# Altium PCB PCB.PcbDoc
Units mm, origin at the board's own origin, x right, y up, seen from the top; angles counter-clockwise.
Board outline 100 x 71 mm, 2 copper layers (TOP, BOT), stack 1.636 mm thick; 74 components, 41 nets, 204 pads, 178 vias.
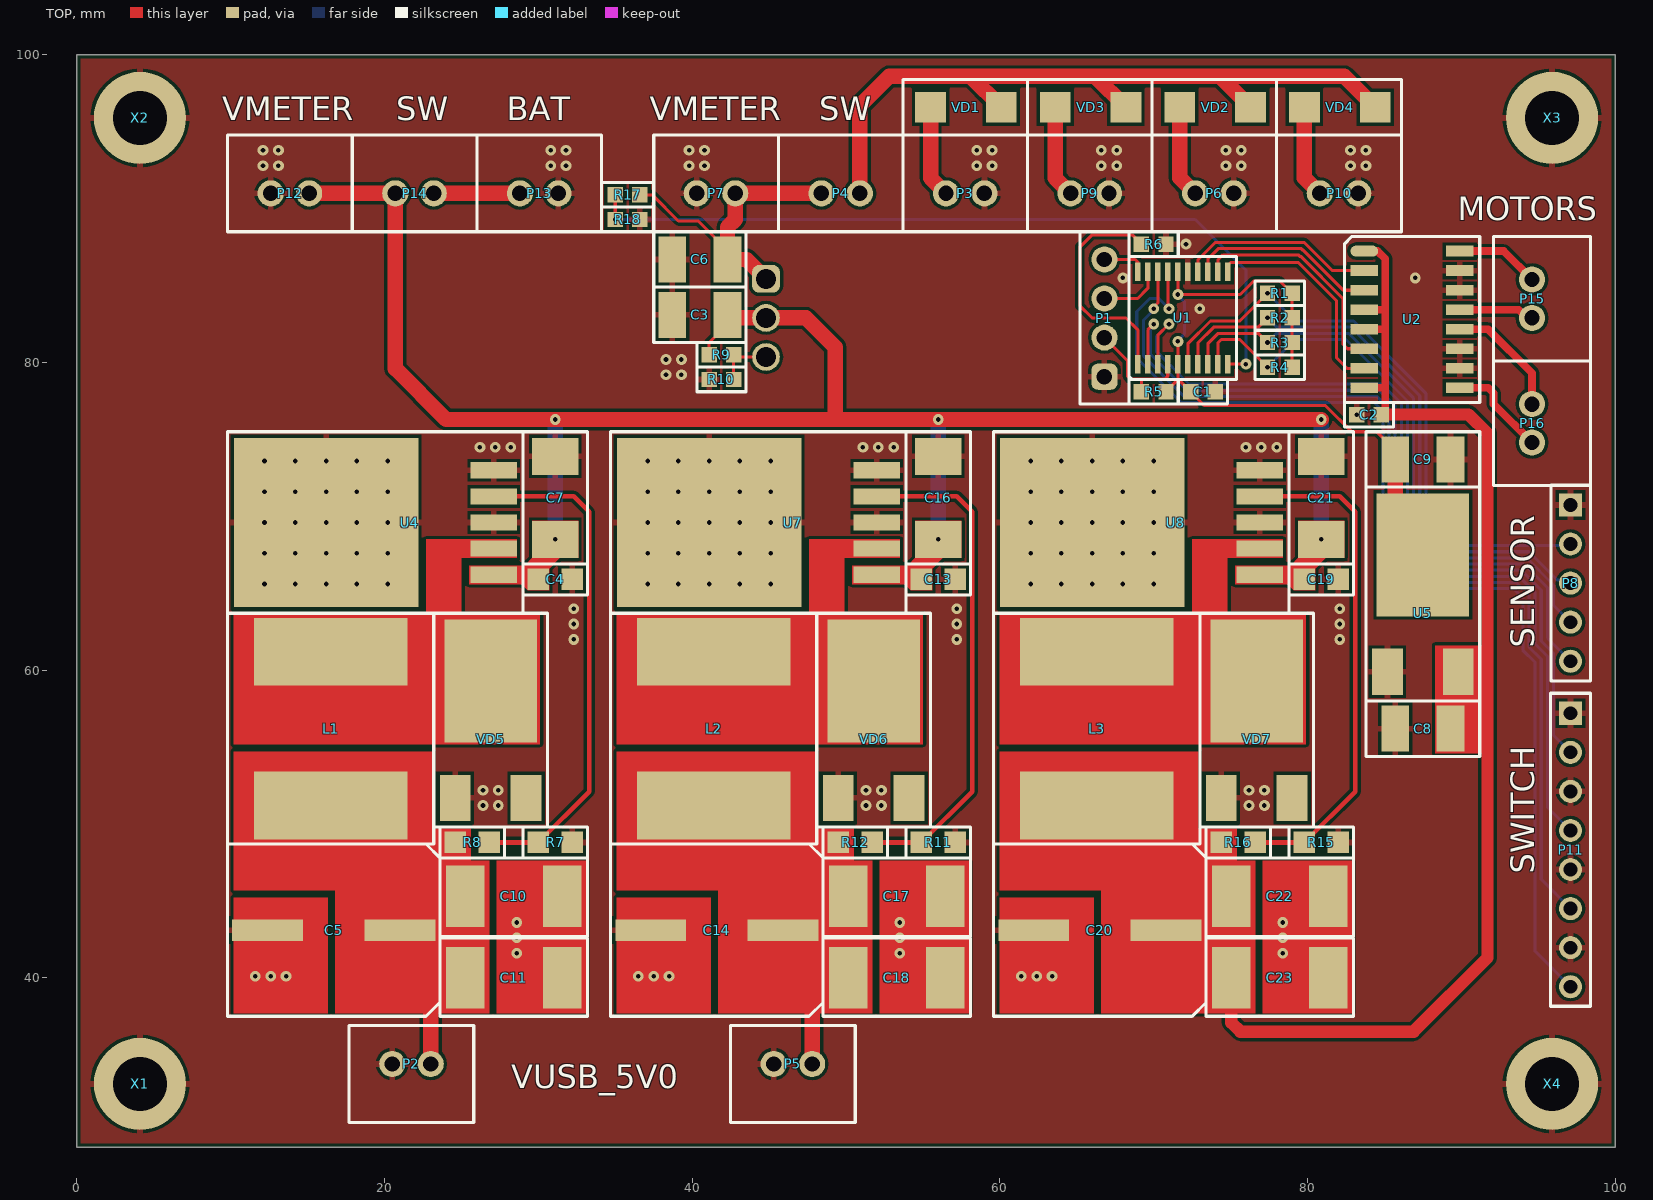
[diagram p0: TOP view]
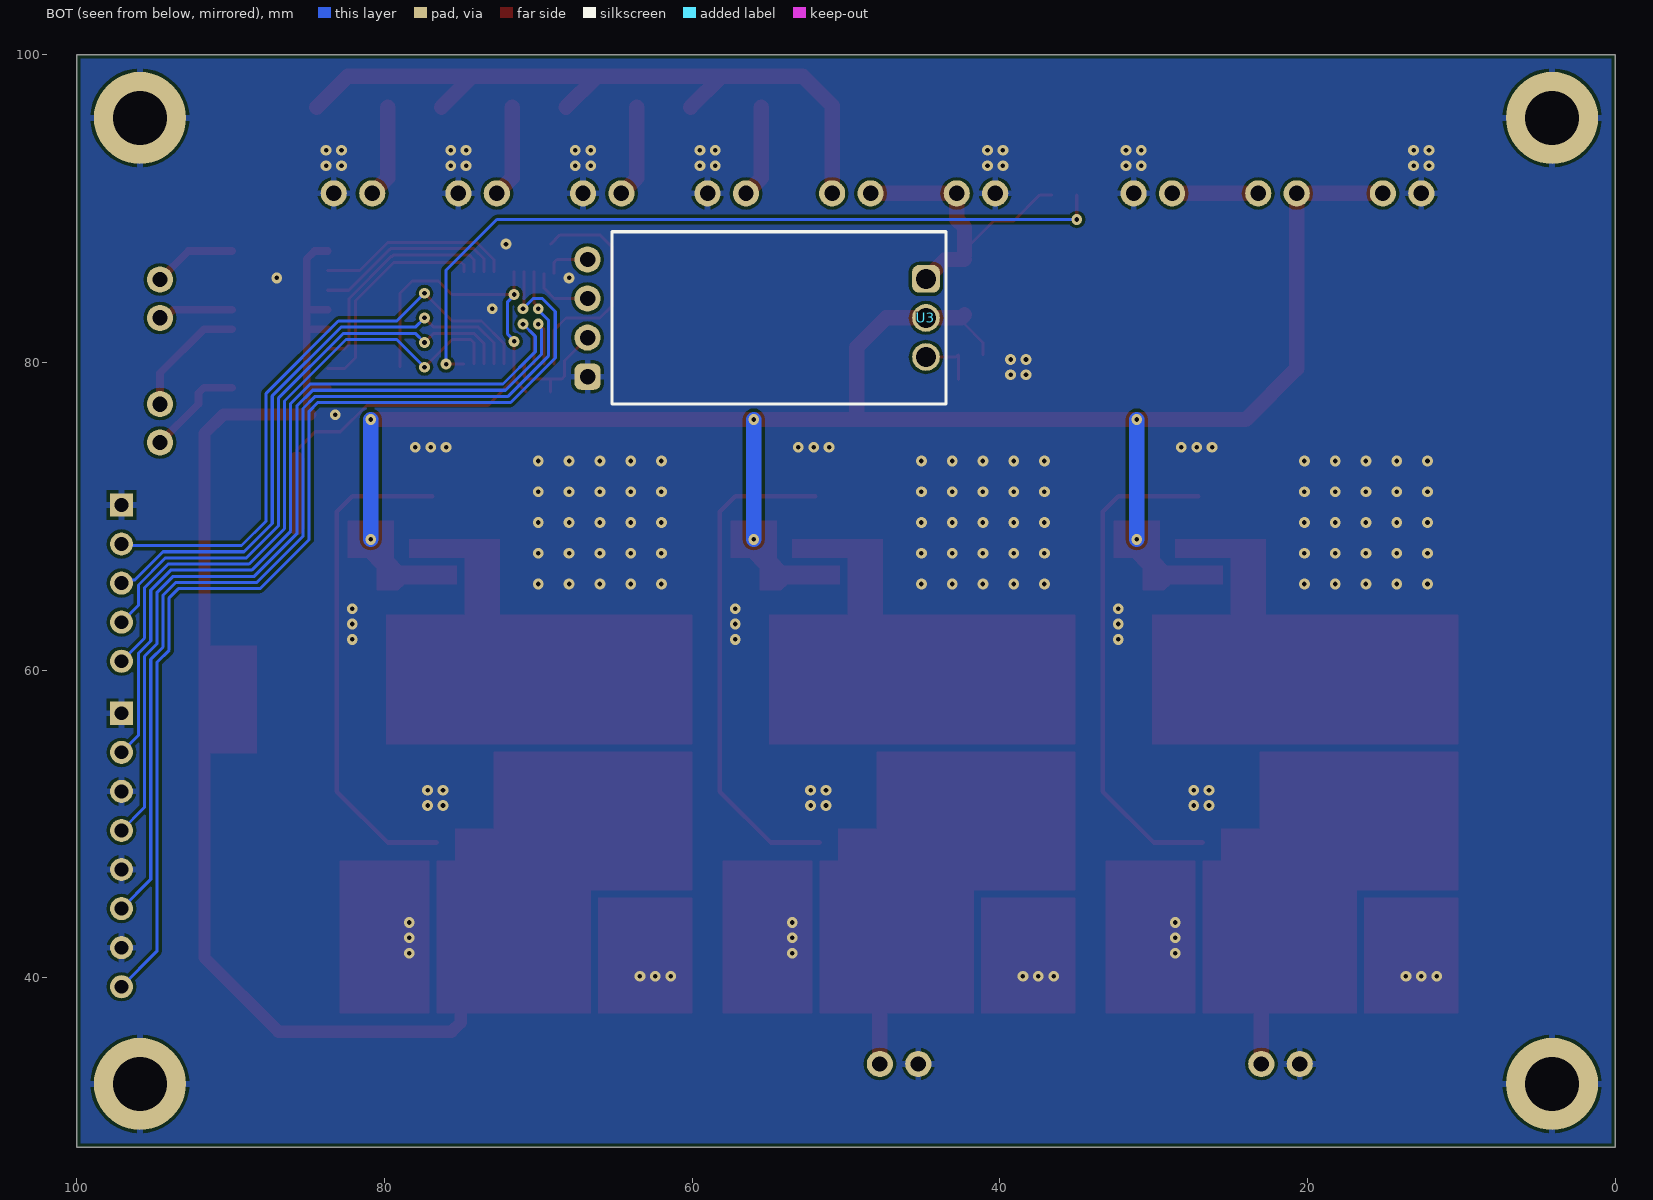
[diagram p1: BOT view, seen from below]
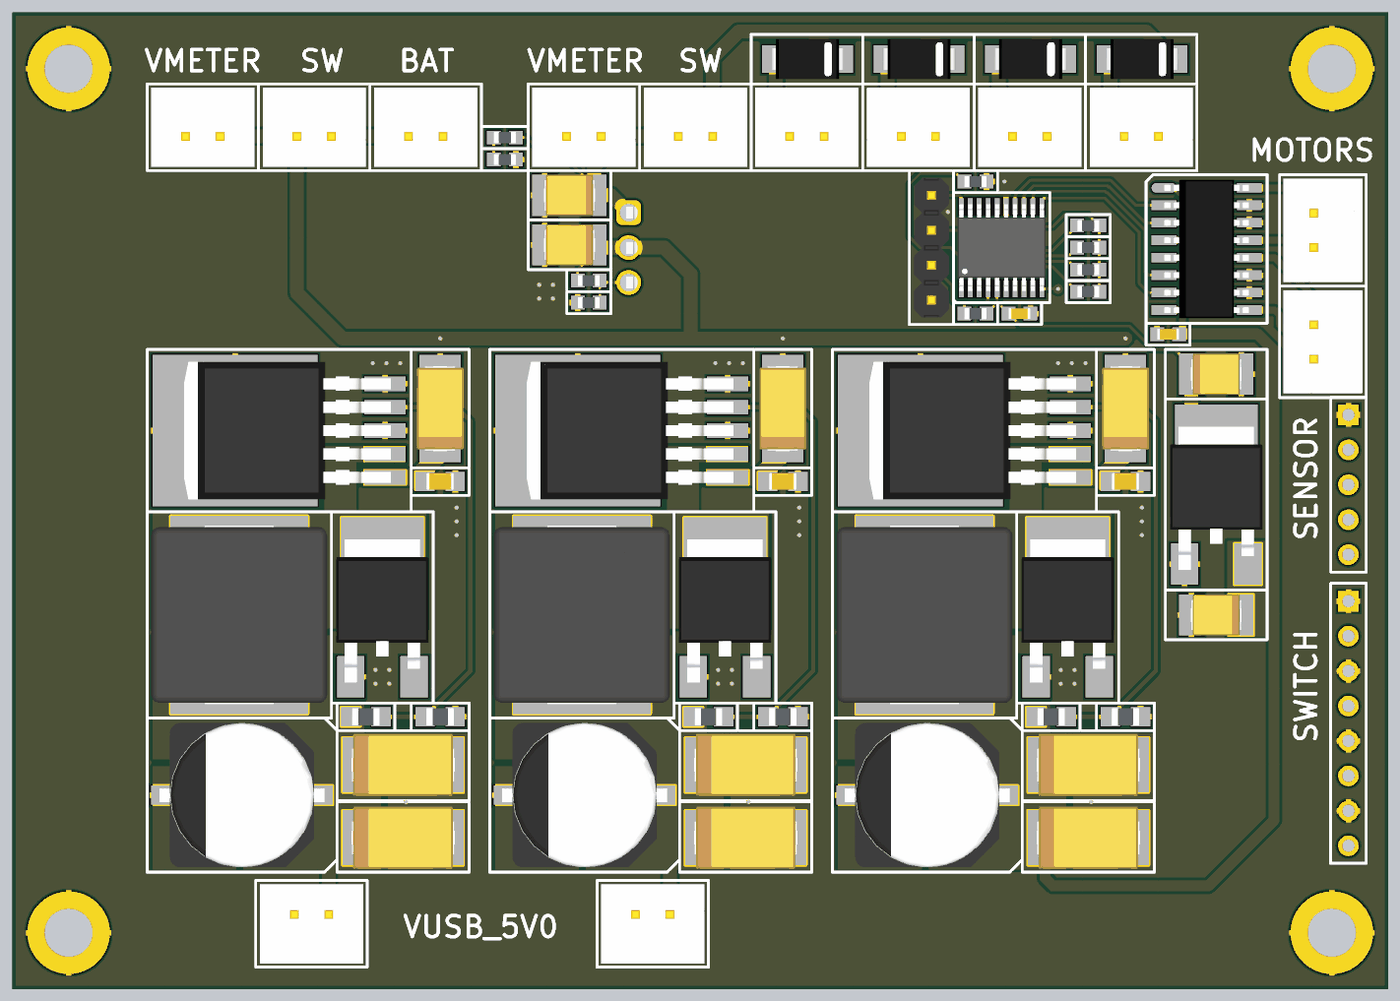
[diagram p2: 3D render of the assembled board from above, using the file's embedded part models]

## Layer stack, top to bottom
Top Solder: solder mask 0.0102, Solder Resist, Dk 3.5
TOP: signal copper 0.018
Dielectric 1: core 1.6, FR-4, Dk 4.2
BOT: signal copper 0.018
Bottom Solder: solder mask 0.0102, Solder Resist, Dk 3.5

## Board outline
0,29 0,100 100,100 100,29

## Design rules (kind name [scope] priority, off if disabled: settings)
AcuteAngle [All] p1 off: minimum=3.50000000000000E+0001 checktracksonly=FALSE
AssemblyTestPointUsage [All] p1 off:
AssemblyTestpoint [All] p1 off: testpointundercomponent=TRUE minsize=1.016 maxsize=2.54 preferedsize=1.524 minholesize=0 maxholesize=1.016 preferedholesize=0.813 testpointgrid=0.025 usegrid=TRUE gridtolerance=0 allowsidetop=TRUE allowsidebottom=TRUE
BoardOutlineClearance "BoardOutlineClearance 1" [All] p1: gap=0.25 ignorepadtopadclearanceinfootprint=FALSE except(0: Arc-SplitContinuation Track-SplitContinuation SMDPad-SplitContinuation THPad-SplitContinuation Via-SplitContinuation Fill-SplitContinuation Poly-SplitContinuation Region-SplitContinuation Text-SplitContinuation) // Milling
BoardOutlineClearance "BoardOutlineClearance 2" [All] p2: gap=0.4 ignorepadtopadclearanceinfootprint=FALSE except(0: Arc-SplitContinuation Track-SplitContinuation SMDPad-SplitContinuation THPad-SplitContinuation Via-SplitContinuation Fill-SplitContinuation Poly-SplitContinuation Region-SplitContinuation Text-SplitContinuation) // V-Cut
Clearance "Clearance-1 1 Oz" [All] p1: gap=0.2 ignorepadtopadclearanceinfootprint=FALSE except(0.25: Arc-Hole Track-Hole SMDPad-Hole THPad-Hole Via-Hole Fill-Hole Poly-Hole Region-Hole Text-Hole) // Standart
Clearance "Clearance-1 1/2 Oz" [All] p2: gap=0.125 ignorepadtopadclearanceinfootprint=FALSE except(0.2: Arc-Fill Arc-Poly Track-Fill Track-Poly SMDPad-SMDPad SMDPad-Fill SMDPad-Poly THPad-Fill THPad-Poly Via-Fill Via-Poly Fill-Fill Fill-Poly Poly-Poly Poly-Region Poly-Text; 0.25: Arc-Hole Track-Hole SMDPad-Hole THPad-Hole Via-Hole Fill-Hole Poly-Hole Region-Hole Text-Hole) // Standart
Clearance "Clearance-2 1 Oz" [All] p3: gap=0.15 ignorepadtopadclearanceinfootprint=FALSE except(0.2: Arc-Fill Arc-Poly Track-Fill Track-Poly SMDPad-Fill SMDPad-Poly THPad-Fill THPad-Poly Via-Fill Via-Poly Fill-Fill Fill-Poly Poly-Poly; 0.25: Arc-Hole Track-Hole SMDPad-Hole THPad-Hole Via-Hole Fill-Hole Poly-Hole Region-Hole Text-Hole) // Advance
Clearance "Clearance-2 1/2 Oz" [All] p4: gap=0.1 ignorepadtopadclearanceinfootprint=FALSE except(0.15: Arc-Fill Arc-Poly Track-Fill Track-Poly SMDPad-SMDPad SMDPad-Fill SMDPad-Poly THPad-Fill THPad-Poly Via-Fill Via-Poly Fill-Fill Fill-Poly Poly-Poly Poly-Region Poly-Text; 0.25: Arc-Hole Track-Hole SMDPad-Hole THPad-Hole Via-Hole Fill-Hole Poly-Hole Region-Hole Text-Hole) // Advance
ComponentClearance [All] p1: gap=0 collisioncheckmode=3 verticalgap=0 showdistances=FALSE
DiffPairsRouting "DiffPairsRouting 1 Oz" [All] p1: maxlimit=0.254 minlimit=0.2 mostfreqgap=0.254 toplayer_minwidth=0.2 toplayer_maxwidth=0.381 toplayer_prefwidth=0.381 bottomlayer_minwidth=0.2 bottomlayer_maxwidth=0.381 bottomlayer_prefwidth=0.381 maxuncoupledlength=12.7
DiffPairsRouting "DiffPairsRouting 1/2 Oz" [All] p2: maxlimit=0.254 minlimit=0.1 mostfreqgap=0.254 toplayer_minwidth=0.1 toplayer_maxwidth=0.381 toplayer_prefwidth=0.381 bottomlayer_minwidth=0.1 bottomlayer_maxwidth=0.381 bottomlayer_prefwidth=0.381 maxuncoupledlength=12.7
FabricationTestPointUsage [All] p1 off: valid=0 allowmultiple=FALSE
FabricationTestpoint [All] p1 off: side=3 testpointundercomponent=TRUE minsize=1.016 maxsize=2.54 preferedsize=1.524 minholesize=0 maxholesize=1.016 preferedholesize=0.813 testpointgrid=0.025 allowsidetop=TRUE allowsidebottom=TRUE usegrid=TRUE gridtolerance=0
HoleSize "Minimum HoleSize" [IsPad] p1: absolutevalues=TRUE maxlimit=5.9 minlimit=0.6 maxpercent=80.000 minpercent=20.000
HoleSize "Minimum HoleSize VIA 1" [IsVia] p2: absolutevalues=TRUE maxlimit=5.9 minlimit=0.3 maxpercent=80.000 minpercent=20.000 // Standart
HoleSize "Minimum HoleSize VIA 2" [IsVia] p3: absolutevalues=TRUE maxlimit=5.9 minlimit=0.2 maxpercent=80.000 minpercent=20.000 // Advance
HoleToHoleClearance Hole2HoleClearance [All] p1: gap=0.25 allowstackedmicrovias=FALSE
MinimumAnnularRing "Minimum AR VIA Standart" [IsVia] p1: minimumring=0.15
MinimumAnnularRing "Minimum AR PAD Standart" [IsPAD] p2: minimumring=0.2
MinimumAnnularRing "Minimum AR VIA Advance" [IsVia] p3: minimumring=0.1
MinimumAnnularRing "Minimum AR PAD Advance" [IsPAD] p4: minimumring=0.15
MinimumSolderMaskSliver "SolderMask Bridge Standart" [All] p1: minsoldermaskwidth=0.15 // All Masks
MinimumSolderMaskSliver "SolderMask Bridge Advance" [All] p2: minsoldermaskwidth=0.1 // Mask LDI
PlaneClearance "PlaneClearance 1 Oz" [All] p1: clearance=0.2
PlaneClearance "PlaneClearance-1 1/2 Oz" [All] p2: clearance=0.2 // Standart
PlaneConnect "TermalConnect 2 Oz" [All] p1: planeconnectstyle=Relief reliefexpansion=0.2 reliefentries=4 reliefconductorwidth=0.3 reliefairgap=0.3 // Standart
PlaneConnect "TermalConnect-1 1 Oz" [All] p2: planeconnectstyle=Relief reliefexpansion=0.2 reliefentries=4 reliefconductorwidth=0.2 reliefairgap=0.2 // Standart
PlaneConnect "TermalConnect-1 1/2 Oz" [All] p3: planeconnectstyle=Relief reliefexpansion=0.2 reliefentries=4 reliefconductorwidth=0.2 reliefairgap=0.2 // Standart
PolygonConnect "PolygonConnect-1 1 Oz" [All] p1: thpad.connectstyle=Relief thpad.reliefconductorwidth=0.4 thpad.reliefentries=4 thpad.polygonreliefangle="90 Angle" thpad.airgapwidth=0.2 smdpad.connectstyle=Relief smdpad.reliefconductorwidth=0.4 smdpad.reliefentries=4 smdpad.polygonreliefangle="90 Angle" smdpad.airgapwidth=0.2 via.connectstyle=Direct via.reliefconductorwidth=0.254 via.reliefentries=4 via.polygonreliefangle="90 Angle" via.airgapwidth=0.254 // Standart
PolygonConnect "PolygonConnect-1 1/2 Oz" [All] p2: thpad.connectstyle=Relief thpad.reliefconductorwidth=0.15 thpad.reliefentries=4 thpad.polygonreliefangle="90 Angle" thpad.airgapwidth=0.2 smdpad.connectstyle=Relief smdpad.reliefconductorwidth=0.2 smdpad.reliefentries=4 smdpad.polygonreliefangle="90 Angle" smdpad.airgapwidth=0.2 via.connectstyle=Direct via.reliefconductorwidth=0.254 via.reliefentries=4 via.polygonreliefangle="90 Angle" via.airgapwidth=0.254 // Standart
RoutingCorners [All] p1 off: cornerstyle=45-Degree minsetback=2.54 maxsetback=2.54
RoutingVias [All] p1: holewidth=0.3 width=0.6 viastyle="Through Hole" minholewidth=0.2 minwidth=0.4 maxholewidth=5.9 maxwidth=6.4
SilkToBoardRegionClearance [All] p1 off:
SilkToSilkClearance Silk2SilkClearance [All] p1 off: silktosilkclearance=0.15
SilkToSolderMaskClearance Silk2SolderMaskClearance [IsPad] p1 off: minsilkscreentomaskgap=0.15 clearancetoexposedcopper=TRUE
SolderMaskExpansion SolderMaskExpansion-1 [All] p1: expansion=0.1 istentingtop=FALSE // Standart
SolderMaskExpansion "SolderMaskExpansion LDI" [All] p2: expansion=0.025 istentingtop=FALSE // Advance
Width "Width 1 Oz" [All] p1: maxlimit=10 minlimit=0.15 preferedwidth=0.2 checkconnectedcopper=TRUE
15 further rules are at their usual default settings.

## Components (designator, comment, footprint, x,y, rotation, side; value= is the part's Value field where it differs from the comment)
C1 "1u 25V" C_0603/1608 73.2,78.1 r0 top
C2 "1u 25V" C_0603/1608 84,76.6 r180 top
C3 "22u 20V" TECAP_TYPE_B 40.5,83.1 r180 top
C4 "10n 25V" C_0805/2012 31.1,65.9 r0 top
C5 "1000u 10V" ECAP_D10.0x10.5 16.7,43.1 r180 top
C6 "33u 25V" TECAP_TYPE_B 40.5,86.7 r180 top
C7 "33u 25V" TECAP_TYPE_C 31.1,71.2 r90 top
C8 "22u 20V" TECAP_TYPE_B 87.5,56.2 r180 top
C9 "22u 20V" TECAP_TYPE_B 87.5,73.7 r0 top
C10 "22u 20V" TECAP_TYPE_D 28.4,45.3 r0 top
C11 "22u 20V" TECAP_TYPE_D 28.4,40 r0 top
C13 "10n 25V" C_0805/2012 56,65.9 r0 top
C14 "1000u 10V" ECAP_D10.0x10.5 41.6,43.1 r180 top
C16 "33u 25V" TECAP_TYPE_C 56,71.2 r90 top
C17 "22u 20V" TECAP_TYPE_D 53.3,45.3 r0 top
C18 "22u 20V" TECAP_TYPE_D 53.3,40 r0 top
C19 "10n 25V" C_0805/2012 80.9,65.9 r0 top
C20 "1000u 10V" ECAP_D10.0x10.5 66.5,43.1 r180 top
C21 "33u 25V" TECAP_TYPE_C 80.9,71.2 r90 top
C22 "22u 20V" TECAP_TYPE_D 78.2,45.3 r0 top
C23 "22u 20V" TECAP_TYPE_D 78.2,40 r0 top
L1 "10uH SRP1265A-220M" L_13x13 16.5,56.2 r270 top
L2 "10uH SRP1265A-220M" L_13x13 41.4,56.2 r270 top
L3 "10uH SRP1265A-220M" L_13x13 66.3,56.2 r270 top
P1 "SWD" "PLS-4 2.54" 66.8,79.08 r90 top
P2 "USB" CWF-2 23,34.4 r180 top
P3 "Solar 1" CWF-2 56.5,91 r0 top
P4 "Solar switch" CWF-2 48.4,91 r0 top
P5 "USB" CWF-2 47.8,34.4 r180 top
P6 "Solar 2" CWF-2 72.7,91 r0 top
P7 "Voltmeter" CWF-2 40.3,91 r0 top
P8 "Solar sensor" HDR1X5 97.1,70.74 r270 top
P9 "Solar 3" CWF-2 64.6,91 r0 top
P10 "Solar 4" CWF-2 80.8,91 r0 top
P11 "Stop switch" HDR1X8 97.1,57.2 r270 top
P12 "Voltmeter" CWF-2 12.6,91 r0 top
P13 "Battery" CWF-2 28.8,91 r0 top
P14 "Battery switch" CWF-2 20.7,91 r0 top
P15 "Motor1" CWF-2 94.6,85.4 r270 top
P16 "Motor2" CWF-2 94.6,77.3 r270 top
R1 "3k" R_0603/1608 78.2,84.5 r180 top
R2 "3k" R_0603/1608 78.2,82.9 r180 top
R3 "3k" R_0603/1608 78.2,81.3 r180 top
R4 "3k" R_0603/1608 78.2,79.7 r180 top
R5 "100k" R_0603/1608 70,78.1 r180 top
R6 "100k" R_0603/1608 70,87.7 r180 top
R7 "1k2" R_0805/2012 31.1,48.8 r180 top
R8 "3k9" R_0805/2012 25.7,48.8 r0 top
R9 "240R" R_0603/1608 41.9,80.5 r180 top
R10 "2k2" R_0603/1608 41.9,78.9 r0 top
R11 "1k2" R_0805/2012 56,48.8 r180 top
R12 "3k9" R_0805/2012 50.6,48.8 r0 top
R15 "1k2" R_0805/2012 80.9,48.8 r180 top
R16 "3k9" R_0805/2012 75.5,48.8 r0 top
R17 "10k" R_0603/1608 35.8,90.9 r0 top
R18 "1k5" R_0603/1608 35.8,89.3 r180 top
U1 "STM32F030F4P6" SO20_0.65 71.9,82.9 r90 top
U2 "MX1508" SO16_1.27 86.8,82.8 r0 top
U3 "LM317" "TO-220 HOR" 44.8,82.9 r270 bottom
U4 "LM2596" TO263-5/D2PAK-5 19.5,69.6 r90 top
U5 "MC33269DT-3.3G" TO252AA/DPAK 87.5,65.5 r0 top
U7 "LM2596" TO263-5/D2PAK-5 44.4,69.6 r90 top
U8 "LM2596" TO263-5/D2PAK-5 69.3,69.6 r90 top
VD1 "Schottky" DO214AC/SMA 57.8,96.6 r0 top
VD2 "Schottky" DO214AC/SMA 74,96.6 r0 top
VD3 "Schottky" DO214AC/SMA 65.9,96.6 r0 top
VD4 "Schottky" DO214AC/SMA 82.1,96.6 r0 top
VD5 "STPS8L30B-TR" TO252AA/DPAK 26.9,57.3 r0 top
VD6 "STPS8L30B-TR" TO252AA/DPAK 51.8,57.3 r0 top
VD7 "STPS8L30B-TR" TO252AA/DPAK 76.7,57.3 r0 top
X1 "Mounting hole" HOLE_M3_D6.0/3.5 4.1,33.1 r0 top
X2 "Mounting hole" HOLE_M3_D6.0/3.5 4.1,95.9 r0 top
X3 "Mounting hole" HOLE_M3_D6.0/3.5 95.9,95.9 r0 top
X4 "Mounting hole" HOLE_M3_D6.0/3.5 95.9,33.1 r0 top

## Footprints (in the part's own frame and the unit in brackets; to place one, negate y for a bottom-side part, rotate by r counter-clockwise, add the part's x,y. Pads: shape width x height; smd on the part's side, far side on the other; paste and mask are expansions set on the pad)
C_0603/1608 [mm] "Capacitor, SMD, 0603 (1608 metric)"
  rect 1x1 smd mask+0.1: 1(-0.8,0) 2(0.8,0)
  silkscreen extent -1.6,-0.8 1.6,0.8, body extent -0.8,-0.4 0.8,0.4, height 0.7
C_0805/2012 [mm] "Capacitor, SMD, 0805 (2012 metric)"
  rect 1.4x1.4 smd mask+0.1: 1(-1.1,0) 2(1.1,0)
  silkscreen extent -2.1,-1 2.1,1, body extent -1,-0.62 1,0.63, height 1.25
CWF-2 [mm] "Pitch 2.50"
  round 1.7 hole 1 mask+0.1: 1(0,0) 2(2.5,0)
  silkscreen extent -2.8,-2.5 5.3,3.8, body extent -2.5,-2.22 5,3.53, height 7
DO214AC/SMA [mm] "SMA diode package"
  rect 2x2 smd mask+0.1: 1(-2.3,0) 2(2.3,0)
  silkscreen extent -4.1,-1.8 4,1.8, body extent -2.64,-1.46 2.64,1.46, height 2.41
ECAP_D10.0x10.5 [mm] "Сapacitor, D10.0x10.5, SMD"
  rect 4.6x1.4 smd mask+0.1: 1(-4.3,0) 2(4.3,0)
  silkscreen extent -6.9,-5.6 6.9,5.6, body extent -6,-5.25 6,5.25, height 10.5
HDR1X5 [mm] "Connector; Header; 5 Position"
  rect 1.5x1.5 hole 0.9: 1(0,0)
  round 1.5 hole 0.9: 2(2.54,0) 3(5.08,0) 4(7.62,0) 5(10.16,0)
  silkscreen extent -1.3,-1.27 11.43,1.3
HDR1X8 [mm] "Connector; Header; 8 Position"
  rect 1.5x1.5 hole 0.9: 1(0,0)
  round 1.5 hole 0.9: 2(2.54,0) 3(5.08,0) 4(7.62,0) 5(10.16,0) 6(12.7,0) 7(15.24,0) 8(17.78,0)
  silkscreen extent -1.3,-1.3 19.05,1.3
HOLE_M3_D6.0/3.5 [mm]
  round 6 hole 3.5 mask+0.1: 1(0,0)
L_13x13 [mm] "Inductor SCDS127T"
  rect 4.4x10 smd mask+0.1: 1(-5,0) 2(5,0)
  silkscreen extent -7.5,-6.7 7.5,6.7, body extent -6.49,-6.4 6.48,6.4, height 8.1
"PLS-4 2.54" [mm] "Pitch 2.54"
  rrect50% 1.7x1.7 hole 1 mask+0.1: 1(0,0)
  round 1.7 hole 1 mask+0.1: 2(2.54,0) 3(5.08,0) 4(7.62,0)
  silkscreen extent -1.78,-1.6 9.42,1.6, body extent -1.27,-1.27 8.89,1.27, height 8.6
R_0603/1608 [mm] "Resistor, SMD, 0603 (1608 metric)"
  rect 1x1 smd mask+0.1: 1(-0.8,0) 2(0.8,0)
  silkscreen extent -1.6,-0.8 1.6,0.8, body extent -0.8,-0.4 0.8,0.4, height 0.45
R_0805/2012 [mm] "Resistor, SMD, 0805 (2012 metric)"
  rect 1.4x1.4 smd mask+0.1: 1(-1.1,0) 2(1.1,0)
  silkscreen extent -2.1,-1 2.1,1, body extent -1,-0.63 1,0.62, height 0.6
SO16_1.27 [mm]
  oval 1.8x0.7 smd: 1(-3.1,4.445)
  rect 1.8x0.7 smd: 2(-3.1,3.175) 3(-3.1,1.905) 4(-3.1,0.635) 5(-3.1,-0.635) 6(-3.1,-1.905) 7(-3.1,-3.175) 8(-3.1,-4.445) 9(3.1,-4.445) 10(3.1,-3.175) 11(3.1,-1.905) 12(3.1,-0.635) 13(3.1,0.635) 14(3.1,1.905) 15(3.1,3.175) 16(3.1,4.445)
  silkscreen extent -4.4,-5.4 4.4,5.4, body extent -3.08,-5.04 3.08,5.04, height 2
SO20_0.65 [mm]
  rect 1.2x0.35 smd mask+0.1: 1(-3,2.925) 2(-3,2.275) 3(-3,1.625) 4(-3,0.975) 5(-3,0.325) 6(-3,-0.325) 7(-3,-0.975) 8(-3,-1.625) 9(-3,-2.275) 10(-3,-2.925) 11(3,-2.925) 12(3,-2.275) 13(3,-1.625) 14(3,-0.975) 15(3,-0.325) 16(3,0.325) 17(3,0.975) 18(3,1.625) 19(3,2.275) 20(3,2.925)
  silkscreen extent -4,-3.5 4,3.5, body extent -3.15,-3.2 3.15,3.2, height 1
TECAP_TYPE_B [mm] "Tantalum capacitor, Type B, SMD"
  rect 1.8x3 smd: 1(-1.8,0) 2(1.8,0)
  silkscreen extent -3,-1.8 3,1.8, body extent -1.85,-1.5 1.85,1.5, height 2.1
TECAP_TYPE_C [mm] "Tantalum capacitor, Type C, SMD"
  rect 2.4x3 smd: 1(-2.7,0) 2(2.7,0)
  silkscreen extent -4.3,-2.1 4.3,2.1, body extent -3.1,-1.7 3.1,1.7, height 2.8
TECAP_TYPE_D [mm] "Tantalum capacitor, Type D, SMD"
  rect 2.5x4 smd: 1(-3.15,0) 2(3.15,0)
  silkscreen extent -4.8,-2.6 4.8,2.5, body extent -3.75,-2.25 3.75,2.25, height 3.1
TO252AA/DPAK [mm] "TO252AA/DPAK package"
  rect 2x3 smd mask+0.1: 1(-2.3,-5.6) 2(2.3,-5.6)
  rect 6x8 smd mask+0.1: 3(0,2)
  silkscreen extent -3.7,-7.5 3.7,6.4, body extent -3.37,-6.01 3.37,4.38, height 2.39
TO263-5/D2PAK-5 [mm] "TO263/D2PAK package, 5 pins version"
  rect 1.05x3 smd mask+0.1: 1(-3.4,-7.6) 2(-1.7,-7.6) 3(0,-7.6) 4(1.7,-7.6) 5(3.4,-7.6)
  rect 11x12 smd mask+0.1: 6(0,3.3)
  silkscreen extent -5.9,-9.5 5.9,9.7, body extent -5,-8 5,7, height 4.42
"TO-220 HOR" [mm] "TO-220 package"
  round 1.8 hole 1.3: 1(2.54,0) 2(0,0)
  rrect50% 1.8x1.8 hole 1.3: 3(-2.54,0)
  silkscreen extent -5.6,-20.4 5.6,1.3, body extent -5.25,-20.05 5.25,0.2, height 4.65

## Part data
C1 C2 C4 C13 C19: library part Capacitor, "Non-polarized capacitor"
C3 C8 C9 C10 C11 C17 C18 C22 C23: library part "Capacitor polar", "Polarized capacitor / (9000629220)"
C5 C14 C20: library part "Capacitor polar", "Polarized capacitor"
C6 C7 C16 C21: library part "Capacitor polar", "Polarized capacitor / (9000629234)"
L1 L2 L3: library part Inductor, "Inductor"
P1: library part "Header 4", "Header, 4-Pin", LatestRevisionDate=17-Jul-2002, LatestRevisionNote="Re-released for DXP Platform.", Publisher="Altium Limited"
P2 P3 P4 P5 P6 P7 P9 P10 P12 P13 P14 P15 P16: library part "Header 2", "Header, 2-Pin", LatestRevisionDate=17-Jul-2002, LatestRevisionNote="Re-released for DXP Platform.", Publisher="Altium Limited"
P8: library part "Header 5", "Header, 5-Pin", LatestRevisionDate=17-Jul-2002, LatestRevisionNote="Re-released for DXP Platform.", Publisher="Altium Limited"
P11: library part "Header 8", "Header, 8-Pin", LatestRevisionDate=17-Jul-2002, LatestRevisionNote="Re-released for DXP Platform.", Publisher="Altium Limited"
R1 R2 R3 R4 R5 R6 R7 R8 R9 R10 R11 R12 R15 R16 R17 R18: library part Resistor, "Resistor"
U1: library part STM32F030F, "32-bit Cortex-M0"
U2: "Dual DC motor driver"
U3: "Linear regulator LM317"
U4 U7 U8: library part LM2576, "DC-DC step-down switching regulator"
U5: library part LM1117, "LDO voltage regulator"
VD1 VD2 VD3 VD4: "Schottky diode"
VD5 VD6 VD7: library part Schottky, "Schottky diode"
X1 X2 X3 X4: "Hole for screw M3, outline D6"

## Via types
v1: diameter 0.7, hole 0.3, TOP to BOT, tented both sides, 178 vias

## Nets (pads, with @x,y where several pads share a name; then routed paths per layer and width w, separated by ;. In a path a pad name is that pad's centre, name@x,y a point inside that pad or via, vN(x,y) a via of type N, cw(c..) or ccw(c..) an arc to the next point about the centre after c; other vN are vias at no path point)
DGND: C1.2 C2.2 C3.2 C4.2 C5.2 C6.2 C7.2 C8.2 C9.2 C10.2 C11.2 C13.2 C14.2 C16.2 C17.2 C18.2 C19.2 C20.2 C21.2 C22.2 C23.2 P1.1 P2.2 P3.2 P5.2 P6.2 P7.1 P8.1 P9.2 P10.2 P11.1 P11.3 P11.5 P11.7 P12.1 P13.2 R6.1 R7.1 R10.1 R11.1 R15.1 R18.1 U1.15 U2.10 U2.11 U2.14 U2.15 U4.3 U4.5 U4.6 U5.1 U7.3 U7.5 U7.6 U8.3 U8.5 U8.6 VD5.1 VD6.1 VD7.1 X1.1 X2.1 X3.1 X4.1
  other v1: 11.6,40.1 12.6,40.1 13.6,40.1 36.5,40.1 37.5,40.1 38.5,40.1 61.4,40.1 62.4,40.1 63.4,40.1 28.6,41.6 53.5,41.6 78.4,41.6 28.6,42.6 53.5,42.6 78.4,42.6 28.6,43.6 53.5,43.6 78.4,43.6 26.4,51.2 27.4,51.2 51.3,51.2 52.3,51.2 76.2,51.2 77.2,51.2 26.4,52.2 27.4,52.2 51.3,52.2 52.3,52.2 76.2,52.2 77.2,52.2 32.3,62 57.2,62 82.1,62 32.3,63 57.2,63 82.1,63 32.3,64 57.2,64 82.1,64 12.2,65.6 14.2,65.6 16.2,65.6 18.2,65.6 20.2,65.6 37.1,65.6 39.1,65.6 41.1,65.6 43.1,65.6 45.1,65.6 62,65.6 64,65.6 66,65.6 68,65.6 70,65.6 12.2,67.6 14.2,67.6 16.2,67.6 18.2,67.6 20.2,67.6 37.1,67.6 39.1,67.6 41.1,67.6 43.1,67.6 45.1,67.6 62,67.6 64,67.6 66,67.6 68,67.6 70,67.6 12.2,69.6 14.2,69.6 16.2,69.6 18.2,69.6 20.2,69.6 37.1,69.6 39.1,69.6 41.1,69.6 43.1,69.6 45.1,69.6 62,69.6 64,69.6 66,69.6 68,69.6 70,69.6 12.2,71.6 14.2,71.6 16.2,71.6 18.2,71.6 20.2,71.6 37.1,71.6 39.1,71.6 41.1,71.6 43.1,71.6 45.1,71.6 62,71.6 64,71.6 66,71.6 68,71.6 70,71.6 12.2,73.6 14.2,73.6 16.2,73.6 18.2,73.6 20.2,73.6 37.1,73.6 39.1,73.6 41.1,73.6 43.1,73.6 45.1,73.6 62,73.6 64,73.6 66,73.6 68,73.6 70,73.6 26.2,74.5 27.2,74.5 28.2,74.5 51.1,74.5 52.1,74.5 53.1,74.5 76,74.5 77,74.5 78,74.5 83.2,76.6 38.3,79.2 39.3,79.2 38.3,80.2 39.3,80.2 73,83.5 68,85.5 87,85.5 72.1,87.7 12.1,92.8 13.1,92.8 30.8,92.8 31.8,92.8 39.8,92.8 40.8,92.8 58.5,92.8 59.5,92.8 66.6,92.8 67.6,92.8 74.7,92.8 75.7,92.8 82.8,92.8 83.8,92.8 12.1,93.8 13.1,93.8 30.8,93.8 31.8,93.8 39.8,93.8 40.8,93.8 58.5,93.8 59.5,93.8 66.6,93.8 67.6,93.8 74.7,93.8 75.7,93.8 82.8,93.8 83.8,93.8
DVDD_3V3: C1.1 C9.1 R1.1 R2.1 R3.1 R4.1 R5.1 U1.5 U1.16 U5.3 | length 42.4
  TOP w0.2: R5.1 71.575,78.875 ; v1(71.575,81.375) U1.5 71.575,78.875 ; U1.16 v1(71.575,84.425) 75.625,84.425 76.5,85.3 78.2,85.3 R1.1 R2.1 R3.1 R4.1 ; C9.1 85.7,74.3 84.9,75.1 84.5,75.5 82.876,75.5 81.176,77.2 79,77.2 73.3,77.2 72.8,77.7 71.625,78.875 71.575,78.875
  TOP w1: U5.3@85.7,69.3 C9.1
  BOT w0.2: v1(71.575,81.375) 71.575,81.417 72,81.842 72,83.958 71.575,84.383 v1(71.575,84.425)
DVDD_5V0: C2.1 C8.1 C20.1 C22.1 C23.1 L3.2 R16.1 U2.1 U2.4 U2.5 U2.8 U5.2 | length 79
  TOP w0.5: U2.8 85.005,78.355 ; U2.5 84.985,82.165 ; U2.4 85.05,83.435 ; U2.1 84.555,87.245 85.05,86.75 85.05,83.435 ; C2.1 84.828,76.628 85.05,76.85 85.05,83.435
  TOP w0.8: C23.1 75.05,37.086 75.636,36.5 86.9,36.5 91.7,41.3 91.7,75.4 90.472,76.628 C2.1@84.828,76.628
MCU_RESET#: P1.2 R5.2 U1.4 | length 7.5
  TOP w0.2: P1.2 68.3,80.12 68.3,79.1 68.483,78.917 69.2,78.917 ; R5.2 69.2,78.917 ; U1.4 70.917,79.892 70.917,79.117 70.717,78.917 69.2,78.917
MCU_SWCLK: P1.4 U1.20 | length 3
  TOP w0.2: P1.4 68.8,86.7 68.975,86.525 U1.20@68.975,85.8
MCU_SWDIO: P1.3 U1.19 | length 4.1
  TOP w0.2: P1.3 68.96,84.16 69.625,84.825 U1.19@69.625,85.8
MOTOR1_IN1: U1.14 U2.2 | length 12.8
  TOP w0.2: U1.14 72.883,85.908 72.883,86.683 74,87.8 79.8,87.8 81.625,85.975 U2.2
MOTOR1_IN2: U1.12 U2.6 | length 14.7
  TOP w0.2: U1.12 74.183,85.908 74.183,86.683 74.5,87 79.4,87 79.5,86.9 79.566,86.9 82.3,84.166 82.3,81.2 82.605,80.895 U2.6
MOTOR1_OUT1: P15.1 U2.16 | length 5.5
  TOP w0.5: U2.16 92.755,87.245 P15.1
MOTOR1_OUT2: P15.2 U2.13 | length 4.9
  TOP w0.2: P15.2@94.268,82.9 P15.2
  TOP w0.5: U2.13 93.733,83.435 P15.2@94.268,82.9
MOTOR2_IN1: U1.13 U2.3 | length 12.4
  TOP w0.2: U1.13 73.525,86.725 74.2,87.4 79.6,87.4 79.7,87.3 79.731,87.3 82.331,84.7 83.695,84.7 U2.3
MOTOR2_IN2: U1.11 U2.7 | length 14.4
  TOP w0.2: U1.11 74.825,86.325 75,86.5 79.4,86.5 81.9,84 81.9,80.3 82.575,79.625 U2.7
MOTOR2_OUT1: P16.1 U2.12 | length 7.9
  TOP w0.5: U2.12 91.735,82.165 94.6,79.3 P16.1
MOTOR2_OUT2: P16.2 U2.9 | length 6.6
  TOP w0.5: U2.9 91.745,78.355 92.1,78 92.1,77.3 P16.2
NetL1_1: L1.1 U4.2 VD5.3
NetL2_1: L2.1 U7.2 VD6.3
NetL3_1: L3.1 U8.2 VD7.3
NetP3_1: P3.1 VD1.1 | length 6
  TOP w1: VD1.1 55.5,92 P3.1
NetP4_2: P4.2 VD1.2 VD2.2 VD3.2 VD4.2 | length 49.3
  TOP w1: P4.2 50.9,96.7 52.8,98.6 58.1,98.6 ; VD1.2 58.1,98.6 ; VD3.2 66.2,98.6 ; VD2.2 74.3,98.6 ; VD4.2 82.4,98.6 74.3,98.6 ; 58.1,98.6 66.2,98.6 ; 66.2,98.6 74.3,98.6
NetP6_1: P6.1 VD2.1 | length 6
  TOP w1: VD2.1 71.7,92 P6.1
NetP9_1: P9.1 VD3.1 | length 6
  TOP w1: VD3.1 63.6,92 P9.1
NetP10_1: P10.1 VD4.1 | length 6
  TOP w1: VD4.1 79.8,92 P10.1
NetP13_1: P13.1 P14.2 | length 5.6
  TOP w1: P14.2 P13.1
NetR6_2: R6.2 U1.1 | length 15
  TOP w0.2: U1.1 68.975,82.125 68.2,82.9 66,82.9 65.2,83.7 65.2,87.5 66,88.3 68.6,88.3 R6.2
NetR7_2: R7.2 R8.2 U4.4 | length 32.7
  TOP w0.3: R8.2 R7.2 33.3,52.1 33.3,70.3 32.3,71.3 U4.4
NetR9_1: R9.1 R10.2 U3.1 | length 3.8
  TOP w0.2: R10.2 R9.1 42.84,80.36 U3.1
NetR11_2: R11.2 R12.2 U7.4 | length 32.7
  TOP w0.3: R12.2 R11.2 58.2,52.1 58.2,70.3 57.2,71.3 U7.4
NetR15_2: R15.2 R16.2 U8.4 | length 32.7
  TOP w0.3: R16.2 R15.2 83.1,52.1 83.1,70.3 82.1,71.3 U8.4
SENSOR_A: P8.2 R1.2 U1.6 | length 39.3
  TOP w0.2: U1.6 72.225,81.225 73.7,82.7 75.6,82.7 v1(77.4,84.5)
  BOT w0.2: v1(77.4,84.5) 79.2,82.7 83,82.7 87.7,78 87.7,69.7 89.3,68.1 97,68.1 P8.2
SENSOR_B: P8.3 R2.2 U1.7 | length 38.3
  TOP w0.2: U1.7 72.875,81.275 73.9,82.3 76.8,82.3 v1(77.4,82.9)
  BOT w0.2: v1(77.4,82.9) 78,82.3 82.834,82.3 87.3,77.834 87.3,69.534 89.134,67.7 94.4,67.7 96.228,65.872 96.888,65.872 P8.3
SENSOR_C: P8.4 R3.2 U1.8 | length 39.1
  TOP w0.2: U1.8 73.525,81.225 74.2,81.9 76.8,81.9 v1(77.4,81.3) R3.2@77.43,81.3
  BOT w0.2: v1(77.4,81.3) 78,81.9 82.669,81.9 86.9,77.669 86.9,69.369 88.969,67.3 94.234,67.3 96,65.534 96,64.22 P8.4
SENSOR_D: P8.5 R4.2 U1.9 | length 41.3
  TOP w0.2: U1.9 74.175,81.275 74.4,81.5 75.6,81.5 v1(77.4,79.7)
  BOT w0.2: v1(77.4,79.7) 79.2,81.5 82.503,81.5 86.5,77.503 86.5,69.203 88.803,66.9 94.069,66.9 95.6,65.369 95.6,62.08 P8.5
SOLAR_VIN: R17.1 R18.2 U1.10 | length 51.2
  TOP w0.2: v1(35,89.3) R17.1 ; U1.10 v1(76,79.9)
  BOT w0.2: v1(35,89.3) 72.7,89.3 76,86 v1(76,79.9)
SWITCH_X1: P11.4 U1.2 | length 57.5
  TOP w0.2: U1.2 69.625,82.125 v1(70,82.5)
  BOT w0.2: v1(70,82.5) 70,82.365 69.8,82.165 69.8,80.531 72.131,78.2 84.672,78.2 85.7,77.172 85.7,68.872 88.472,66.1 93.737,66.1 94.8,65.037 94.8,61.7 95.6,60.9 95.6,51.08 P11.4
SWITCH_X2: P11.2 U1.3 | length 52.6
  TOP w0.2: U1.3 70.275,81.775 v1(71,82.5)
  BOT w0.2: v1(71,82.5) 70.2,81.7 70.2,80.697 72.297,78.6 84.837,78.6 86.1,77.337 86.1,69.037 88.637,66.5 93.903,66.5 95.2,65.203 95.2,61.9 96,61.1 96,55.76 P11.2
SWITCH_Y1: P11.6 U1.18 | length 63.7
  TOP w0.2: v1(70,83.5) 70,83.592 70.275,83.867 U1.18
  BOT w0.2: v1(70,83.5) 70,83.419 69.35,82.769 69.35,80.416 71.966,77.8 84.506,77.8 85.3,77.006 85.3,68.706 88.306,65.7 93.572,65.7 94.4,64.872 94.4,61.5 95.2,60.7 95.2,46.4 P11.6
SWITCH_Y2: P11.8 U1.17 | length 71.2
  TOP w0.2: U1.17 70.925,83.575 v1(71,83.5)
  BOT w0.2: v1(71,83.5) 70.35,84.15 69.731,84.15 68.9,83.319 68.9,80.3 71.8,77.4 84.34,77.4 84.9,76.84 84.9,68.5 88.1,65.3 93.406,65.3 94,64.706 94,61.3 94.8,60.5 94.8,41.72 P11.8
VBAT_12V7: C3.1 C4.1 C7.1 C13.1 C16.1 C19.1 C21.1 P12.2 P14.1 R9.2 U3.2 U4.1 U7.1 U8.1 | length 117.2
  TOP w0.2: R9.2 41.1,81.3 C3.1@42.3,82.5
  TOP w1: P12.2 P14.1 ; P14.1@20.834,91.134 P14.1 ; C3.1 42.5,82.9 U3.2 47.4,82.9 49.3,81 49.3,76.3 ; v1(80.9,76.3) v1(56,76.3) 49.3,76.3 ; P14.1 20.7,79.6 24,76.3 v1(31.1,76.3) 49.3,76.3
  BOT w1: v1(31.1,68.5) v1(31.1,76.3) ; v1(56,68.5) v1(56,76.3) ; v1(80.9,68.5) v1(80.9,76.3)
VIN_18V0: C6.1 P4.1 P7.2 R17.2 U3.3 | length 20.6
  TOP w0.2: R17.2 37.4,90.9 39.1,89.2 40.4,89.2 41.5,88.1 42.3,87.3 42.3,86.983 C6.1
  TOP w1: C6.1 43.54,86.7 U3.3 ; C6.1@42.3,86.983 42.3,88.8 42.8,89.3 P7.2 P4.1
VUSB1_5V0: C5.1 C10.1 C11.1 L1.2 P2.1 R8.1 | length 3.7
  TOP w1: P2.1 23,38.1
VUSB2_5V0: C14.1 C17.1 C18.1 L2.2 P5.1 R12.1 | length 3.7
  TOP w1: P5.1 47.8,38.1
pads on no net: VD5.2 VD6.2 VD7.2

## Polygon pours and split planes (outlines as drawn)
DGND on TOP "TOP_DGND" (solid, remove dead copper, pour order 0): 0,0 0,100 100,100 100,29 55,29 55,0
DGND on BOT "BOT_DGND" (solid, remove dead copper, pour order 1): 0,0 0,100 100,100 100,0.117 55,0.117 55,0

## Other copper
TOP:
  region net DVDD_5V0: 92,54.6 88.3,54.6 88.3,61.6 92,61.6
  region net NetL1_1: 28.6,67.3 28.6,68.5 22.7,68.5 22.7,63.6 10.2,63.6 10.2,55.2 30.1,55.2 30.1,63.6 25,63.6 25,67.3
  region net VUSB1_5V0: 26.8,37.7 26.8,47.6 25.6,47.6 25.6,49.7 23.1,49.7 23.1,54.7 10.2,54.7 10.2,45.7 16.8,45.7 16.8,37.7 24.2,37.7
  region net DGND: 10.2,37.7 10.2,45.2 16.3,45.2 16.3,37.7
  region net VBAT_12V7: 25.5,65.6 25.5,66.8 29.1,66.8 29.6,67.3 29.6,69.7 32.6,69.7 32.6,67.3 31.4,67.3 30.7,66.6 30.7,65.2 29.3,65.2 28.9,65.6
  region net VBAT_12V7: 50.4,65.6 50.4,66.8 54,66.8 54.5,67.3 54.5,69.7 57.5,69.7 57.5,67.3 56.3,67.3 55.6,66.6 55.6,65.2 54.2,65.2 53.8,65.6
  region net NetL2_1: 53.5,67.3 53.5,68.5 47.6,68.5 47.6,63.6 35.1,63.6 35.1,55.2 55,55.2 55,63.6 49.9,63.6 49.9,67.3
  region net DVDD_5V0: 76.6,37.7 76.6,47.6 75.4,47.6 75.4,49.7 72.9,49.7 72.9,54.7 60,54.7 60,45.7 66.6,45.7 66.6,37.7 74,37.7
  region net NetL3_1: 78.4,67.3 78.4,68.5 72.5,68.5 72.5,63.6 60,63.6 60,55.2 79.9,55.2 79.9,63.6 74.8,63.6 74.8,67.3
  region net DGND: 60,37.7 60,45.2 66.1,45.2 66.1,37.7
  region net VBAT_12V7: 75.3,65.6 75.3,66.8 78.9,66.8 79.4,67.3 79.4,69.7 82.4,69.7 82.4,67.3 81.2,67.3 80.5,66.6 80.5,65.2 79.1,65.2 78.7,65.6
  region net DGND: 77.1,37.7 77.1,47.6 82.9,47.6 82.9,37.7
  region net DGND: 52.2,37.7 52.2,47.6 58,47.6 58,37.7
  region net DGND: 27.3,37.7 27.3,47.6 33.1,47.6 33.1,37.7
  region net DGND: 35.1,37.7 35.1,45.2 41.2,45.2 41.2,37.7
  region net VUSB2_5V0: 51.7,37.7 51.7,47.6 50.5,47.6 50.5,49.7 48,49.7 48,54.7 35.1,54.7 35.1,45.7 41.7,45.7 41.7,37.7 49.1,37.7

## Silkscreen, mask and mechanical layers (free items; w line width, h text height)
Top Overlay:
  text "VMETER" at 9.454,95.754 h1.52
  text "SW" at 20.754,95.754 h1.52
  text "BAT" at 27.954,95.754 h1.52
  text "VMETER" at 37.254,95.754 h1.52
  text "SW" at 48.254,95.754 h1.52
  text "MOTORS" at 89.754,89.254 h1.52
  text "SENSOR" at 94.746,61.454 h1.52 r90
  text "SWITCH" at 94.746,46.754 h1.52 r90
  text "VUSB_5V0" at 28.254,32.808 h1.52
M4-BOARD:
  the board outline again, w0.2